# Altium PCB adc.PcbDoc
Units mil, origin at the board's own origin, x right, y up, seen from the top; angles counter-clockwise.
Board outline 6000 x 4000 mil, 2 copper layers (Top Layer, Bottom Layer); 54 components, 38 nets, 159 pads, 0 vias.
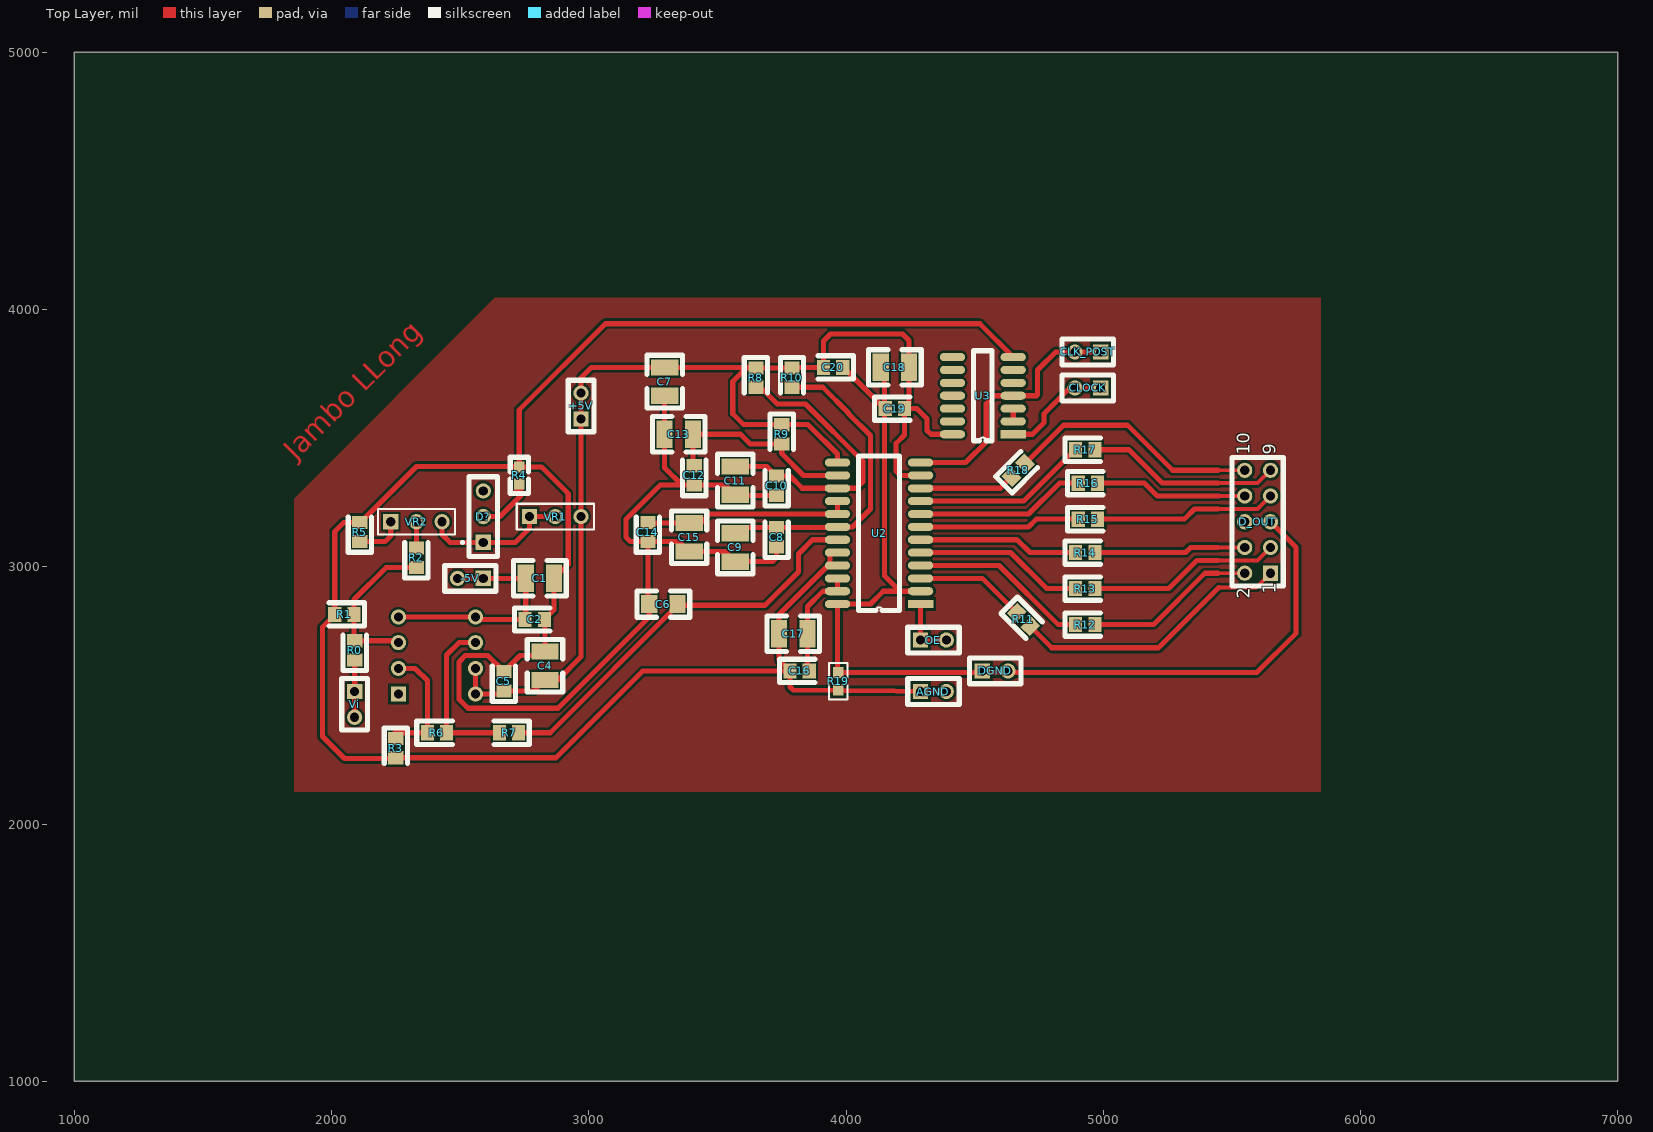
[diagram p0: Top Layer view]
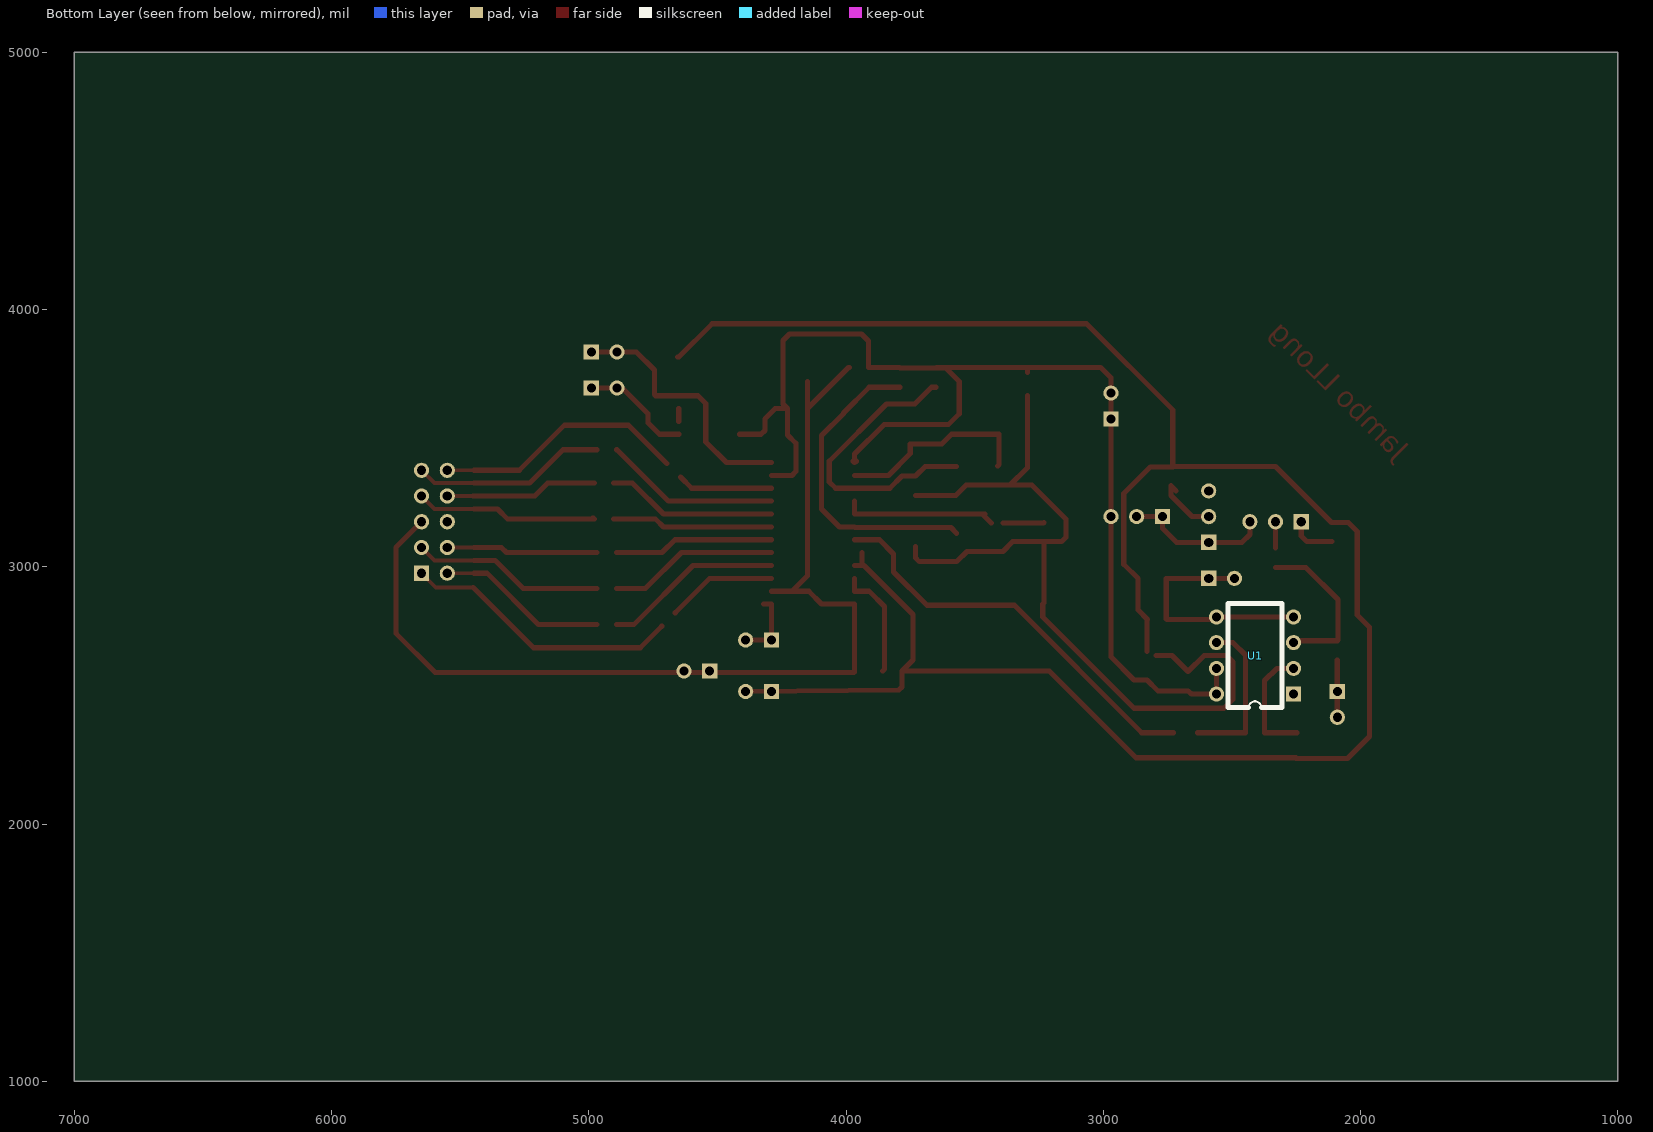
[diagram p1: Bottom Layer view, seen from below]

## Layer stack, top to bottom
Top Layer: signal copper 1.4
Dielectric: dielectric 12.6, FR-4, Dk 4.8
Bottom Layer: signal copper 1.4

## Board outline
1000,1000 7000,1000 7000,5000 1000,5000

## Design rules (kind name [scope] priority, off if disabled: settings)
Clearance [All] p1: gap=10
PolygonConnect [All] p1: connectstyle=Relief reliefconductorwidth=10 reliefentries=4 polygonreliefangle="90 Angle"
RoomDefinition RoomDefinition_1_1 [InComponentClass('Components Class 1') vs False] p1: confinementstyle=ConfineIn formatcopy=TRUE lockcomponents=FALSE outline 5905,2100 1815,2100 1815,4115 5905,4115
RoutingVias [All] p1: holewidth=28 width=50 viastyle="Through Hole" minholewidth=28 minwidth=50 maxholewidth=28 maxwidth=50
SilkscreenOverComponentPads [All] p1: minsilkscreentomaskgap=10
SolderMaskExpansion [All] p1: expansion=4
TestPointUsage [All] p1: valid=0 allowmultiple=FALSE
Testpoint [All] p1: side=15 testpointundercomponent=TRUE minsize=40 maxsize=100 preferedsize=60 minholesize=0 maxholesize=40 preferedholesize=32 testpointgrid=1 style=1023 order=0123456789
Width [All] p1: maxlimit=20 minlimit=10 preferedwidth=20
23 further rules are at their usual default settings.

## Components (designator, comment, footprint, x,y, rotation, side; value= is the part's Value field where it differs from the comment)
+5V "5V" HDR1X2 2970,3575 r90 top
-5V "-5V" HDR1X2 2590,2955 r180 top
AGND "AGND" HDR1X2 4290,2515 r0 top
C1 "" CR3225-1210 2810,2955 r180 top
C2 "" CC2012-0805 2790,2795 r0 top
C4 "" CR3225-1210 2830,2615 r90 top
C5 "" CC2012-0805 2670,2555 r90 top
C6 "" CR3216-1206 3290,2855 r0 top
C7 "" CR3225-1210 3294.88,3719.88 r270 top
C8 "" CC2012-0805 3730,3115 r90 top
C9 "" CR3225-1210 3570,3075 r270 top
C10 "" CC2012-0805 3730,3315 r90 top
C11 "" CR3225-1210 3570,3335 r270 top
C12 "" CC2012-0805 3410,3355 r90 top
C13 "" CR3225-1210 3350,3515 r180 top
C14 "" CC2012-0805 3230,3135 r90 top
C15 "" CR3225-1210 3390,3115 r270 top
C16 "" CC2012-0805 3820,2595 r0 top
C17 "" CR3225-1210 3795,2740 r180 top
C18 "" CR3225-1210 4190,3775 r180 top
C19 "" CC2012-0805 4190,3615 r0 top
C20 "" CC2012-0805 3950,3775 r180 top
CLK_POST "CLOCK" HDR1X2 4990,3835 r180 top
CLOCK "CLOCK" HDR1X2 4990,3695 r180 top
D? "Diode BAT17" PIN3 2590,3095 r90 top
D_OUT "D_OUT" HDR2X5 5650,2975 r90 top
DGND "DGND" HDR1X2 4530,2595 r0 top
OE "OE" HDR1X2 4290,2715 r0 top
R0 "" CC2012-0805 2090,2675 r90 top
R1 "" CC2012-0805 2050,2815 r180 top
R2 "" CC2012-0805 2330,3035 r90 top
R3 "" CC2012-0805 2250,2295 r270 top
R4 "Res3" C1608-0603 2730,3355 r90 top
R5 "" CC2012-0805 2110,3135 r90 top
R6 "" CC2012-0805 2410,2355 r0 top
R7 "" CC2012-0805 2690,2355 r180 top
R8 "" CC2012-0805 3650,3735 r270 top
R9 "" CC2012-0805 3750,3515 r270 top
R10 "" CC2012-0805 3790,3735 r270 top
R11 "" CC2012-0805 4690,2795 r315 top
R12 "" CC2012-0805 4930,2775 r0 top
R13 "" CC2012-0805 4930,2915 r0 top
R14 "" CC2012-0805 4930,3055 r0 top
R15 "" CC2012-0805 4940,3185 r0 top
R16 "" CC2012-0805 4940,3325 r0 top
R17 "" CC2012-0805 4930,3455 r0 top
R18 "" CC2012-0805 4670,3375 r45 top
R19 "Res3" C1608-0603 3970,2555 r90 top
U1 "OPA642" DIP-8 2410,2655 r90 bottom
U2 "TLC5510" "SOP-24 - duplicate3" 4290,2855 r180 top
U3 "74ACT04" SOP-14 4650,3515 r180 top
Vi "Vi" HDR1X2 2090,2515 r270 top
VR1 "Res Tap" HDR1X3 2770,3195 r0 top
VR2 "Res Tap" HDR1X3 2230,3175 r0 top

## Footprints (in the part's own frame and the unit in brackets; to place one, negate y for a bottom-side part, rotate by r counter-clockwise, add the part's x,y. Pads: shape width x height; smd on the part's side, far side on the other; paste and mask are expansions set on the pad)
C1608-0603 [mm]
  rect 1.1x1 smd: 1(-0.85,0) 2(0.85,0)
  silkscreen extent -1.8,-0.9 1.8,0.9
CC2012-0805 [mm]
  rect 1.3x1.5 smd: 1(-0.95,0) 2(0.95,0)
  silkscreen extent -2,-1.15 1.5,1.15
CR3216-1206 [mm]
  rect 1.6x1.8 smd: 1(-1.4,0) 2(1.4,0)
  silkscreen extent -2.6,-1.3 2.6,1.3
CR3225-1210 [mm]
  rect 1.6x2.7 smd: 1(-1.4,0) 2(1.4,0)
  silkscreen extent -2.6,-1.75 2.6,1.75
DIP-8 [mm]
  rect 1.5x1.5 hole 0.9: 1(-3.81,-3.81)
  round 1.5 hole 0.9: 2(-1.27,-3.81) 3(1.27,-3.81) 4(3.81,-3.81) 5(3.81,3.81) 6(1.27,3.81) 7(-1.27,3.81) 8(-3.81,3.81)
  silkscreen extent -5.15,-2.65 5.15,2.65
HDR1X2 [mm] "Connector; Header; 2 Position"
  rect 1.5x1.5 hole 0.9: 1(0,0)
  round 1.5 hole 0.9: 2(2.54,0)
  silkscreen extent -1.27,-1.27 3.81,1.27
HDR1X3 [mm] "Connector; Header; 3 Position"
  rect 1.5x1.5 hole 0.9: 1(0,0)
  round 1.5 hole 0.9: 2(2.54,0) 3(5.08,0)
  silkscreen extent -1.27,-1.27 6.35,1.27
HDR2X5 [mm] "Connector; Header; 5x2 Position"
  rect 1.5x1.5 hole 0.9: 1(0,0)
  round 1.5 hole 0.9: 2(0,2.54) 3(2.54,0) 4(2.54,2.54) 5(5.08,0) 6(5.08,2.54) 7(7.62,0) 8(7.62,2.54) 9(10.16,0) 10(10.16,2.54)
  silkscreen extent -1.27,-1.27 11.43,3.81
PIN3 [mm] "Connector; 2-Conductor Jack, 1 break contact"
  rect 1.5x1.5 hole 0.9: 1(0,0)
  oval 1.51x1.5 hole 0.9: 2(2.54,0)
  round 1.5 hole 0.9: 3(5.08,0)
  silkscreen extent -1.4,-1.4 6.48,2.17
SOP-14 [mm]
  rect 2.5x0.8 smd: 1(0,0)
  oval 2.5x0.8 smd: 2(0,-1.27) 3(0,-2.54) 4(0,-3.81) 5(0,-5.08) 6(0,-6.35) 7(0,-7.62) 8(6,-7.62) 9(6,-6.35) 10(6,-5.08) 11(6,-3.81) 12(6,-2.54) 13(6,-1.27) 14(6,0)
  silkscreen extent 2.08,-8.25 3.92,0.64
"SOP-24 - duplicate3" [mm]
  rect 2.5x0.8 smd: 1(0,0)
  oval 2.5x0.8 smd: 2(0,-1.27) 3(0,-2.54) 4(0,-3.81) 5(0,-5.08) 6(0,-6.35) 7(0,-7.62) 8(0,-8.89) 9(0,-10.16) 10(0,-11.43) 11(0,-12.7) 12(0,-13.97) 13(8.2,-13.97) 14(8.2,-12.7) 15(8.2,-11.43) 16(8.2,-10.16) 17(8.2,-8.89) 18(8.2,-7.62) 19(8.2,-6.35) 20(8.2,-5.08) 21(8.2,-3.81) 22(8.2,-2.54) 23(8.2,-1.27) 24(8.2,0)
  silkscreen extent 2.08,-14.6 6.11,0.64

## Part data
+5V -5V AGND CLK_POST CLOCK DGND OE Vi: library part "Header 2", "Header, 2-Pin"
C1 C7 C8 C9 C14 C16 C18 C20: library part Cap, "Capacitor"
C2 C4 C5 C6 C10 C11 C12 C13 C15 C17 C19: library part Cap2, "Capacitor"
D?: "Silicon RF Schottky Diode for Mixer Applications in the VHF/UHF Range"
D_OUT: library part "Header 5X2", "Header, 5-Pin, Dual row"
R0 R1 R2 R5 R6 R7 R8 R9 R10 R11 R12 R13 R14 R15 R16 R17 R18: library part Res3, "Resistor"
R3: library part "Res Tap", "Tapped Resistor"
R4 R19: "Resistor"
VR1 VR2: "Tapped Resistor"

## Nets (pads, with @x,y where several pads share a name; then routed paths per layer and width w, separated by ;. In a path a pad name is that pad's centre, name@x,y a point inside that pad or via, vN(x,y) a via of type N, cw(c..) or ccw(c..) an arc to the next point about the centre after c; other vN are vias at no path point)
+5: +5V.1 +5V.2 C4.1 C5.1 C7.1 C18.1 C19.2 C20.2 R8.1 R9.1 R10.1 U1.7 U1.8 U2.11 U2.13 U3.14 VR1.3 | length 4734.2
  Top Layer w20: U1.7 U1.8 2657.4,2505 C5.1 2787.72,2517.6 C4.1 2879.88,2559.88 2970,2650 2970,3735 3010,3775 R8.1@3647.4,3775 ; C7.1@3294.88,3755.12 C7.1 ; U2.13@3960,3410 3962.17,3410 U2.13 ; U2.13@3972.6,3410.43 U2.13 ; U2.11 4210,3355 4195,3370 4195,3480 4227.4,3512.4 C19.2 ; U3.14 4330,3515 4315,3530 4315,3575 4275,3615 C19.2 ; U2.13 3967.17,3437.83 3852.6,3552.4 3602.6,3552.4 3560,3595 3560,3720 3612.4,3772.4 R10.1 3792.6,3775 C20.2 3912.6,3877.6 3940,3905 4220,3905 4245.12,3879.88 4245.12,3632.72 C19.2
-5: -5V.1 -5V.2 C1.2 C2.1 U1.4 U1.5 | length 927.6
  Top Layer w20: U1.4 U1.5 ; -5V.2 C1.2 2754.88,2797.28 C2.1 2570,2795 U1.5 ; U1.5@2560,2800 U1.5
ADC_VI: C6.2 R7.1 U2.19 | length 1591.4
  Top Layer w20: R7.1 2850,2355 3345.12,2850.12 3685.12,2850.12 3815,2980 3815,3050 3870,3105 U2.19
AGND: AGND.1 AGND.2 C1.1 C2.2 C4.2 C5.2 C6.1 C7.2 C8.1 C9.2 C10.1 C11.2 C12.1 C13.2 C14.1 C15.2 C16.1 C17.2 R1.2 R3.2 R4.2 R5.2 R19.1 U2.20 U2.21 U3.7 | length 11599.8
  Top Layer w10: C16.1@3782.6,2592.4 C16.1
  Top Layer w20: R5.2 2047.4,3172.4 2012.6,3137.6 2012.6,2812.6 1965,2765 1965,2340 2050.08,2254.92 2155,2254.92 2200,2254.88 R3.2@2249.99,2254.78 ; R5.2@2112.4,3172.4 2330,3390 2728.46,3390 R4.2 ; R3.2 2872.6,2257.6 3210,2595 C16.1 3739.88,2637.72 3739.88,2814.88 3930,3005 U2.21 ; C4.2@2794.88,2655 2732.6,2655 C5.2 2607.4,2655 2520,2655 2495,2630 2495,2485 2530,2450 2880,2450 3234.88,2804.88 C6.1 3230,2859.88 C14.1 ; C4.2 2830,2792.4 C2.2 2865.12,2832.72 C1.1 2920,3009.88 2920,3285 2816.54,3388.46 R4.2 ; C7.2 3294.88,3385.12 3362.4,3317.6 ; C11.2 3532.28,3317.6 3277.6,3317.6 3145,3185 3145,3115 3162.4,3097.6 3352.28,3097.6 C15.2 3530,3059.88 C9.2 3714.88,3019.88 3730,3035 C8.1 ; C11.2@3572.28,3277.6 C10.1 ; C17.2@3739.76,2739.88 C17.2@3740,2740.12 ; C16.1@3782.6,2592.4 3782.6,2532.4 3793.46,2521.54 AGND.2 ; U2.21@3937.17,3005 U2.20@3937.17,3055 ; U3.7@4655,3815 U3.7 4520,3945 3065,3945 2730,3610 R4.2
DGND: C18.2 C19.1 C20.1 D_OUT.5 DGND.1 DGND.2 R19.2 U2.2 U2.24 | length 3999.2
  Top Layer w20: C20.1 3990,3775 C19.1@4150,3615 ; 4150,3720 4150,2965 4210,2905 ; U2.2 4145,2905 4095,2855 U2.24 3967.17,2591.3 R19.2 5596.54,2588.46 5748.07,2740 5750,2740 5750,3075 D_OUT.5
NetC8_2: C8.2 C9.1 R10.2 U2.18 | length 1233.5
  Top Layer w20: C9.1 3592.28,3152.4 3964.57,3152.4 U2.18 4025,3155 4095,3225 4095,3510 4010,3595 4010,3597.6 3910,3697.6 R10.2
NetC10_2: C10.2 C11.1 R8.2 U2.15 | length 1154.7
  Top Layer w20: C11.1 3692.28,3390.12 C10.2 3782.6,3352.4 3830,3305 4040,3305 4065,3330 4065,3410 3842.6,3632.4 3732.6,3632.4 3667.4,3697.6 R8.2
NetC12_2: C12.2 C13.1 R9.2 U2.14 | length 778.6
  Top Layer w20: C12.2 3405.12,3397.28 C13.1 3590,3515 3627.4,3477.6 R9.2 ; R9.2@3747.4,3475 R9.2 ; U2.14 3835,3355 3750,3440 R9.2
NetC14_2: C14.2 C15.1 U2.16 U2.17 | length 767.4
  Top Layer w20: C14.2 3232.28,3170.12 C15.1 ; C15.1@3435.12,3170.12 3470,3205 ; 3460,3205 U2.17 U2.16
NetC16_2: C16.2 C17.1 U2.22 U2.23 | length 445
  Top Layer w20: C16.2 3850.12,2602.28 C17.1 3850.12,2845.12 3910,2905 U2.23 U2.22
NetCLK_POST_1: CLK_POST.1 CLK_POST.2 U2.12 U3.4 | length 1021.6
  Top Layer w20: U2.12 4465,3405 4545,3485 4545,3635 4575,3665 4740,3665 4745,3670 4745,3765 4815,3835 CLK_POST.1
NetCLOCK_1: CLOCK.1 CLOCK.2 U3.1 | length 435.1
  Top Layer w20: U3.1 4725,3515 4770,3560 4770,3595 4870,3695 CLOCK.1
NetD?_1: D?.1 VR1.1 VR1.2 VR2.3 | length 598.5
  Top Layer w20: VR2.3 2430,3125 2460,3095 2715,3095 2770,3150 VR1.1 VR1.2 ; VR1.1@2750,3195 VR1.1@2770,3175
NetD?_3: D?.2 R4.1 | length 247.1
  Top Layer w20: D?.2 2655,3195 2736.54,3276.54 2736.54,3315 2716.54,3295
NetD_OUT_1: D_OUT.1 R11.2 | length 1088.3
  Top Layer w15: 5450,2920 5595,2920 D_OUT.1
  Top Layer w20: R11.2 4800,2685 5215,2685 5450,2920
NetD_OUT_2: D_OUT.2 R12.2 | length 665.4
  Top Layer w15: 5445,2975 D_OUT.2
  Top Layer w20: R12.2 5195,2775 5395,2975 5445,2975
NetD_OUT_3: D_OUT.3 R13.2 | length 748.9
  Top Layer w15: 5445,3025 5600,3025 D_OUT.3
  Top Layer w20: R13.2 5255,2915 5365,3025 5445,3025
NetD_OUT_4: D_OUT.4 R14.2 | length 605
  Top Layer w15: 5445,3075 D_OUT.4
  Top Layer w20: R14.2 5320,3055 5340,3075 5445,3075 ; D_OUT.4@5540,3065 D_OUT.4
NetD_OUT_7: D_OUT.7 R15.2 | length 722.5
  Top Layer w15: 5445,3225 5600,3225 D_OUT.7 ; D_OUT.7@5645,3270 D_OUT.7@5650,3270
  Top Layer w20: R15.2 5315,3185 5355,3225 5445,3225 ; R15.2@4982.4,3190 R15.2@4985,3190 ; D_OUT.7@5650,3270 D_OUT.7
NetD_OUT_8: D_OUT.8 R16.2 | length 593.3
  Top Layer w15: 5450,3275 D_OUT.8
  Top Layer w20: R16.2 5160,3325 5210,3275 5450,3275
NetD_OUT_9: D_OUT.9 R17.2 | length 757.2
  Top Layer w15: 5445,3325 5600,3325 D_OUT.9
  Top Layer w20: R17.2 5100,3455 5230,3325 5445,3325
NetD_OUT_10: D_OUT.10 R18.2 | length 987.6
  Top Layer w15: 5445,3375 D_OUT.10
  Top Layer w20: R18.2 4845,3550 5095,3550 5270,3375 5445,3375
NetOE_1: OE.1 OE.2 U2.1 | length 270
  Top Layer w20: U2.1@4320,2855 U2.1 OE.1 OE.2
NetR0_1: R0.1 Vi.1 Vi.2 | length 234.7
  Top Layer w20: R0.1 2090,2410 Vi.2@2095,2405
NetR0_2: R0.2 R1.1 R2.1 U1.3 | length 628.6
  Top Layer w20: U1.3 2252.6,2712.4 R0.2 2087.4,2715 2087.4,2872.4 2212.6,2997.6 R2.1
NetR2_2: R2.2 VR2.2 | length 102.6
  Top Layer w20: R2.2 VR2.2
NetR3_1: R3.1 R6.1 U1.2 | length 459.9
  Top Layer w20: R3.1@2247.4,2355 R6.1 2372.6,2557.4 2325,2605 U1.2
NetR5_1: R5.1 VR2.1 | length 184.3
  Top Layer w20: R5.1 2207.6,3097.6 2230,3120 VR2.1
NetR6_2: R6.2 R7.2 U1.6 | length 619.9
  Top Layer w20: U1.6 2495,2705 2447.4,2657.4 R6.2 R7.2@2632.6,2355
NetR11_1: R11.1 U2.3 | length 428.9
  Top Layer w20: U2.3 4530,2955 R11.1
NetR12_1: R12.1 U2.4 | length 697.9
  Top Layer w20: U2.4 4595,3005 4825,2775 R12.1
NetR13_1: R13.1 U2.5 | length 660.6
  Top Layer w20: U2.5 4640,3055 4780,2915 R13.1
NetR14_1: R14.1 U2.6 | length 623.3
  Top Layer w20: U2.6 4665,3105 4715,3055 R14.1
NetR15_1: R15.1 U2.7 | length 625
  Top Layer w20: U2.7 4710,3155 4740,3185 R15.1
NetR16_1: R16.1 U2.8 | length 662.3
  Top Layer w20: U2.8 4710,3205 4830,3325 R16.1
NetR17_1: R17.1 U2.9 | length 685.4
  Top Layer w20: U2.9 4690,3255 4890,3455 R17.1
NetR18_1: R18.1 U2.10 | length 371.6
  Top Layer w20: U2.10 4600,3305 R18.1
NetU3_2: U3.2 U3.3 | length 50
  Top Layer w20: U3.2 U3.3
pads on no net: D?.3 D_OUT.6 U1.1 U3.5 U3.6 U3.8 U3.9 U3.10 U3.11 U3.12 U3.13

## Polygon pours and split planes (outlines as drawn)
no net on Top Layer "Top Layer-No Net" (solid, pour order 1000): 1855,3115 1855,2125 5845,2125 5845,4045 2635,4045 1855,3265

## Other copper
Top Layer:
  text "Jambo LLong" at 1860,3410 h80 r45

## Text inside footprints (layer, text, board x,y; h text height)
D_OUT: Top Overlay "2" at 5570,2875 h50 r90; Top Overlay "1" at 5670,2895 h50 r90; Top Overlay "9" at 5670,3435 h50 r90; Top Overlay "10" at 5570,3435 h50 r90